# Altium PCB AcousticsSingleChannel.PcbDoc
Units mil, origin at the board's own origin, x right, y up, seen from the top; angles counter-clockwise.
Board outline 1010 x 3000 mil, 4 copper layers (Top Layer, Int1 (GND), Int2 (AGND), Bottom Layer), stack 53.912 mil thick; 56 components, 34 nets, 159 pads, 36 vias.
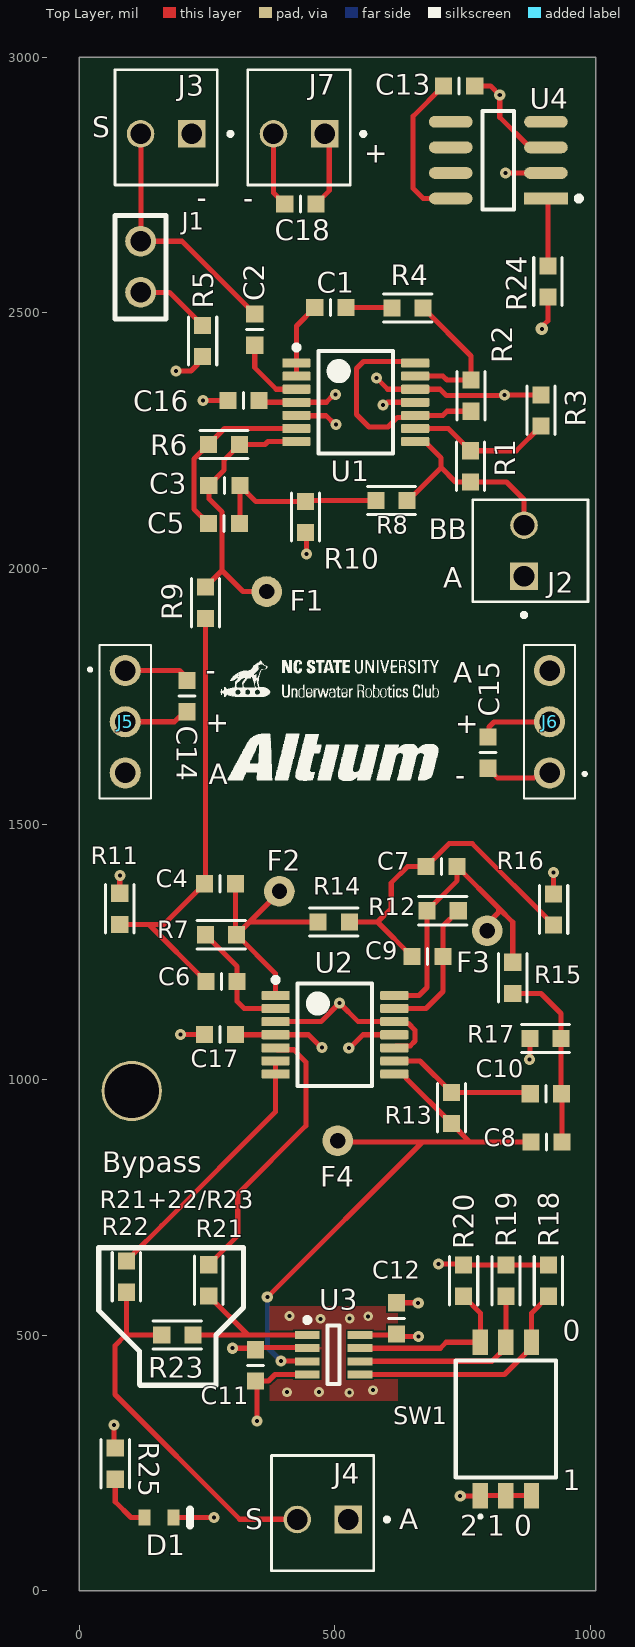
[diagram p0: Top Layer view]
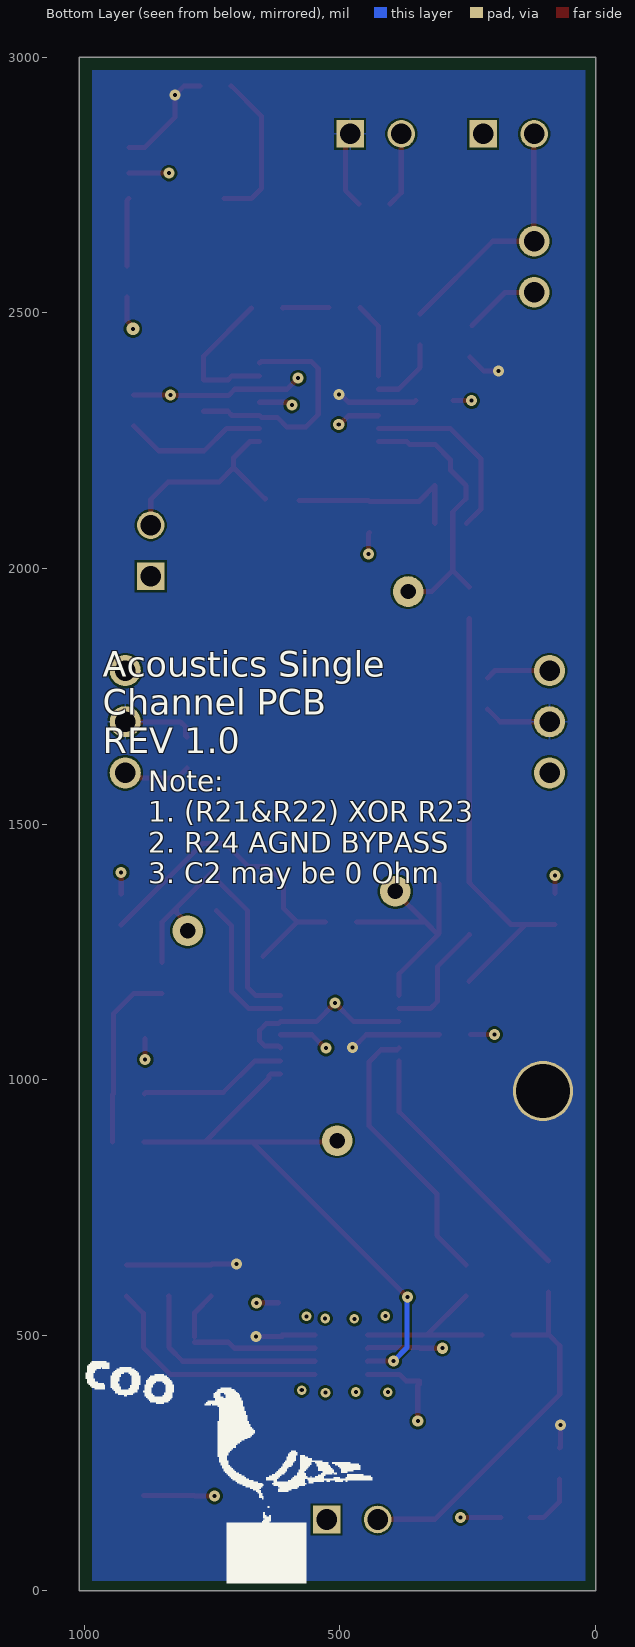
[diagram p1: Bottom Layer view, seen from below]
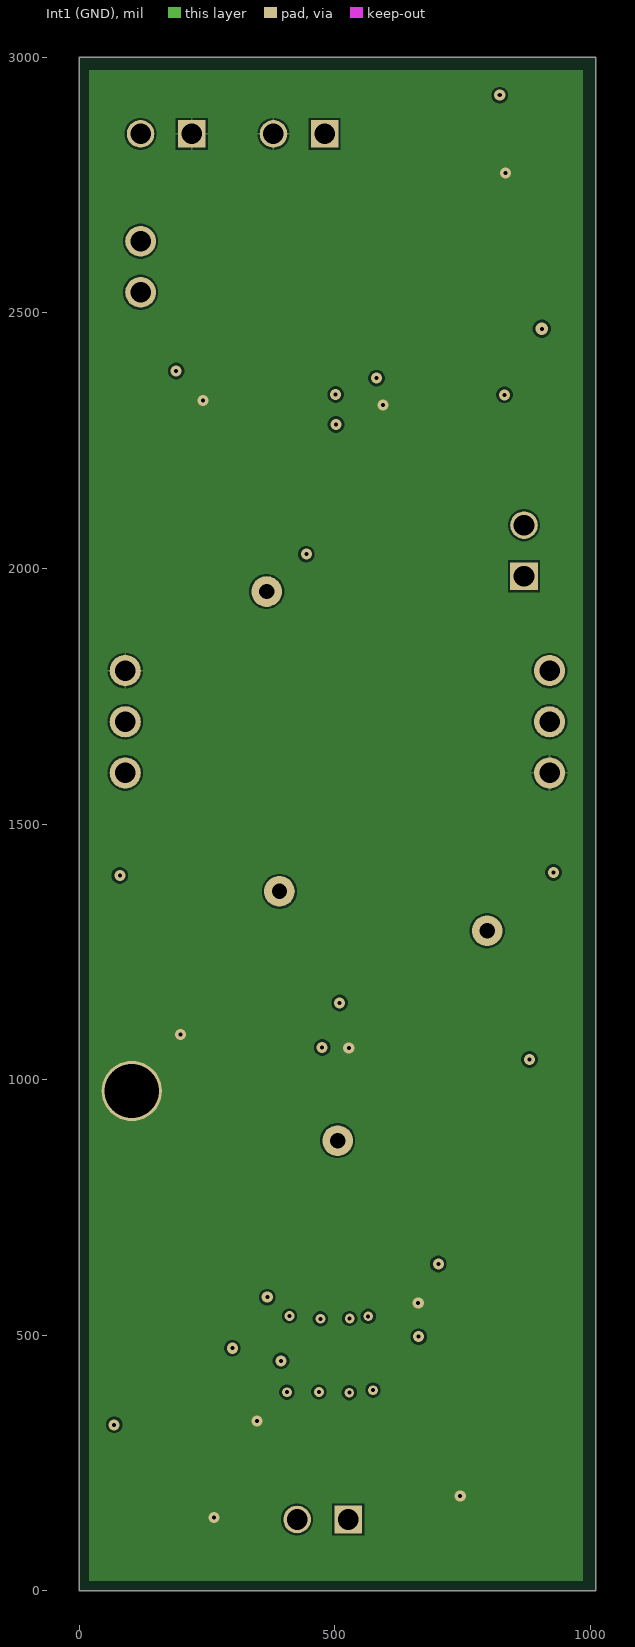
[diagram p2: Int1 (GND)]
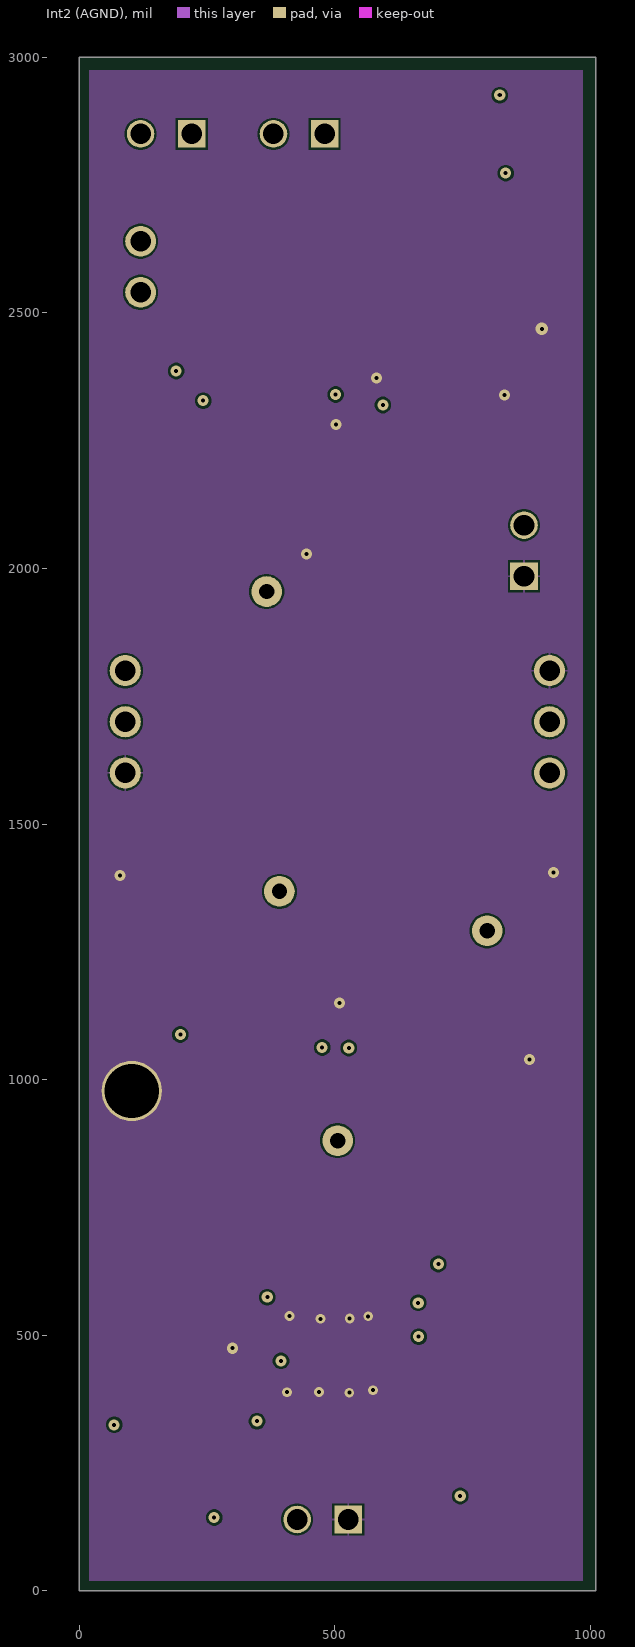
[diagram p3: Int2 (AGND)]
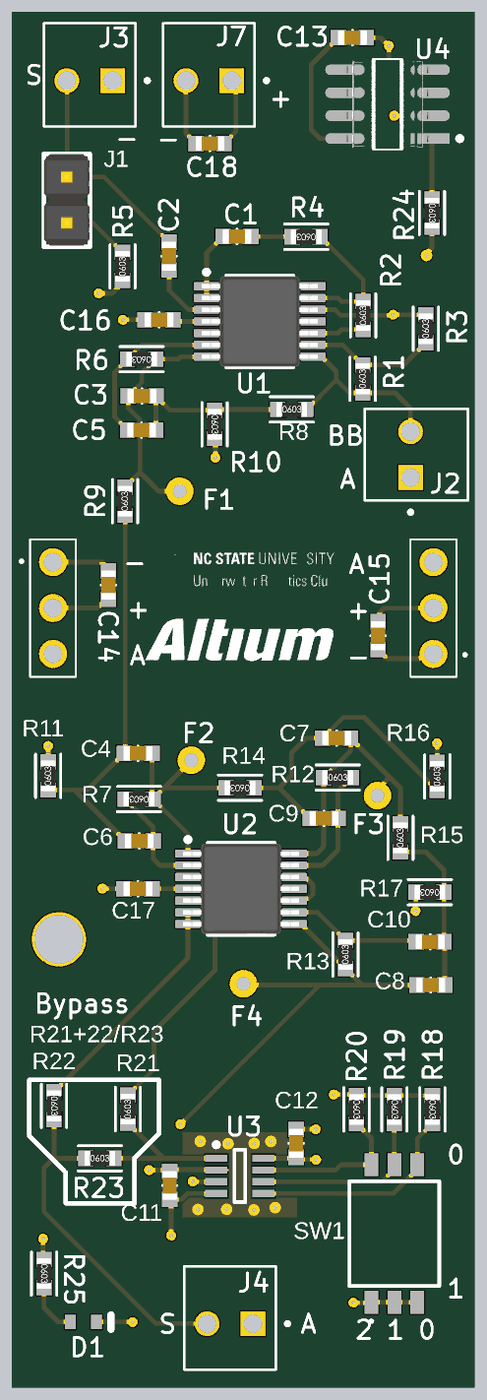
[diagram p4: 3D render of the assembled board from above, using the file's embedded part models]

## Layer stack, top to bottom
Top Solder: solder mask 1, SM-001, Dk 4
Top Layer: signal copper 1.378
Dielectric 1: prepreg 5.1, PP-017, Dk 4.3
Dielectric 2: prepreg 5.1, PP-017, Dk 4.3
Int1 (GND): signal copper 1.378
Dielectric 3: core 28, Core-039, Dk 4.8
Int2 (AGND): signal copper 1.378
Dielectric 4: prepreg 5.1, PP-017, Dk 4.3
Dielectric 5: prepreg 5.1, PP-017, Dk 4.3
Bottom Layer: signal copper 1.378
Bottom Solder: solder mask 1, SM-001, Dk 4

## Board outline
0,0 1010,0 1010,3000 0,3000

## Design rules (kind name [scope] priority, off if disabled: settings)
BoardOutlineClearance [All] p1: gap=7.87 ignorepadtopadclearanceinfootprint=FALSE
Clearance [All] p1: gap=4 ignorepadtopadclearanceinfootprint=FALSE except(5: Arc-Via Track-Via SMDPad-Via THPad-Via Via-Via Via-Fill Via-Poly Via-Region Via-Text; 9.84: Arc-Hole Track-Hole SMDPad-Hole THPad-Hole Via-Hole Fill-Hole Poly-Hole Region-Hole Text-Hole)
ComponentClearance [All] p1: gap=4 collisioncheckmode=3 verticalgap=4 showdistances=TRUE
DiffPairsRouting [All] p1: maxlimit=4 minlimit=4 mostfreqgap=4 toplayer_minwidth=4 toplayer_maxwidth=71497.94 toplayer_prefwidth=4 midlayer1_minwidth=4 midlayer1_maxwidth=71497.94 midlayer1_prefwidth=4 midlayer2_minwidth=4 midlayer2_maxwidth=71497.94 midlayer2_prefwidth=4 bottomlayer_minwidth=4 bottomlayer_maxwidth=71497.94 bottomlayer_prefwidth=4 maxuncoupledlength=500
Height [All] p1: minheight=0 maxheight=71497.94 prefheight=500
HoleSize [All] p1: absolutevalues=TRUE maxlimit=248.03 minlimit=7.87 maxpercent=80.000 minpercent=20.000
HoleToHoleClearance [All] p1: gap=9.84 allowstackedmicrovias=FALSE
MinimumAnnularRing [All] p1: minimumring=3
MinimumSolderMaskSliver [All] p1: minsoldermaskwidth=0
PlaneClearance [All] p1: clearance=4
PlaneConnect PlaneConnectPowerPads [InPadClass('PowerPads')] p1: planeconnectstyle=Direct reliefexpansion=20 reliefentries=4 reliefconductorwidth=10 reliefairgap=10
PlaneConnect [All] p2: pad.planeconnectstyle=Relief pad.reliefexpansion=11.81 pad.reliefentries=4 pad.reliefconductorwidth=4 pad.reliefairgap=4 via.planeconnectstyle=Direct via.reliefexpansion=11.81 via.reliefentries=4 via.reliefconductorwidth=5 via.reliefairgap=5
PolygonConnect PolygonConnectPowerPads [All vs (InPadClass('PowerPads'))] p1: connectstyle=Direct reliefconductorwidth=10 reliefentries=4 polygonreliefangle="90 Angle" airgapwidth=10
PolygonConnect [All] p2: thpad.connectstyle=Relief thpad.reliefconductorwidth=4 thpad.reliefentries=4 thpad.polygonreliefangle="90 Angle" thpad.airgapwidth=4 smdpad.connectstyle=Relief smdpad.reliefconductorwidth=4 smdpad.reliefentries=4 smdpad.polygonreliefangle="90 Angle" smdpad.airgapwidth=4 via.connectstyle=Direct via.reliefconductorwidth=5 via.reliefentries=4 via.polygonreliefangle="90 Angle" via.airgapwidth=5
RoutingVias [All] p1: holewidth=7.87 width=17.72 viastyle="Through Hole" minholewidth=7.87 minwidth=17.72 maxholewidth=248.03 maxwidth=257.87
SilkToSilkClearance [All] p1: silktosilkclearance=0
SilkToSolderMaskClearance [IsPad] p1: minsilkscreentomaskgap=4 clearancetoexposedcopper=TRUE
SolderMaskExpansion [All] p1: expansion=2.95 istentingtop=FALSE
Width [All] p1: maxlimit=71497.94 minlimit=4 preferedwidth=4
20 further rules are at their usual default settings.

## Classes and differential pairs
component class U_OutputAmplifier: C11 C12 R18 R19 R20 U3
component class U_BufferBiasAmp: C1 C2 C16 J1 R1 R2 R3 R4 R5 U1
component class Channel: C13 C14 C15 C18 D1 J2 J3 J4 J5 J6 J7 R21 R22 R23 R24 R25 U4
component class "U_Band Pass Filter": C3 C4 C5 C6 C7 C8 C9 C10 C17 R6 R7 R8 R9 R10 R11 R12 R13 R14 R15 R16 R17 U2

## Components (designator, comment, footprint, x,y, rotation, side; value= is the part's Value field where it differs from the comment)
C1 "5100pF" SMD-0603C 491.35,2510.22 r270 top
C2 "5100pF" SMD-0603C 343.3,2467.14 r0 top
C3 "1000pF" SMD-0603C 283.91,2162.2 r270 top
C4 "1000pF" SMD-0603C 275.37,1383.13 r90 top
C5 "1000pF" SMD-0603C 283.18,2087.94 r270 top
C6 "1000pF" SMD-0603C 278.24,1192.19 r90 top
C7 "1000pF" SMD-0603C 708.78,1416.54 r90 top
C8 "1000pF" SMD-0603C 914.16,878 r270 top
C9 "1000pF" SMD-0603C 681.23,1241.08 r90 top
C10 "1000pF" SMD-0603C 912.8,972.4 r270 top
C11 "1µF" SMD-0603C 344.54,440.92 r0 top
C12 "0.10µF" SMD-0603C 620.38,532.88 r0 top
C13 "0.10µF" SMD-0603C 743.26,2943.98 r90 top
C14 "1µF" SMD-0603C 210.98,1750.1 r0 top
C15 "1µF" SMD-0603C 799.35,1639.61 r180 top
C16 "1µF" SMD-0603C 321.26,2328.58 r90 top
C17 "1µF" SMD-0603C 275.3,1087.9 r90 top
C18 "1µF" SMD-0603C 432.51,2712.91 r90 top
D1 "TLMS1100-GS08" VISH-TLMX1100_V 156.29,143.18 r0 top value=1.9V
J1 "Header" "1x2 Header" 120,2590 r270 top
J2 "640456-2" TE_640456-2 870.11,1984.56 r270 top
J3 "640456-2" TE_640456-2 220,2850 r0 top
J4 "640456-2" TE_640456-2 526.18,139.45 r0 top
J5 "TSW-103-07-L-S" TSW-103-XX-YY-S 90,1800 r270 top
J6 "TSW-103-07-L-S" TSW-103-XX-YY-S 920,1600 r90 top
J7 "640456-2" TE_640456-2 480,2850 r0 top
R1 "10k" SMD-0603-RES 765.54,2199.64 r0 top
R2 "10k" SMD-0603-RES 766.61,2337.97 r0 top
R3 "1k" SMD-0603-RES 903.39,2309.05 r0 top
R4 "10k" SMD-0603-RES 642.34,2509.52 r90 top
R5 "4.7k" SMD-0603-RES 241.54,2444.87 r0 top
R6 "54.9k" SMD-0603-RES 283.18,2242.45 r90 top
R7 "41.2k" SMD-0603-RES 277.52,1283.35 r90 top
R8 "17.4k" SMD-0603-RES 610.91,2132.9 r270 top
R9 "13k" SMD-0603-RES 247.03,1932.88 r0 top
R10 "698" SMD-0603-RES 442.42,2100.59 r180 top
R11 "536" SMD-0603-RES 79.36,1334.05 r0 top
R12 "165k" SMD-0603-RES 710.95,1330.26 r270 top
R13 "86.6k" SMD-0603-RES 728.06,944.56 r0 top
R14 "11k" SMD-0603-RES 497.96,1308.18 r90 top
R15 "5.76k" SMD-0603-RES 847.99,1199.02 r0 top
R16 "332" SMD-0603-RES 928.14,1332.85 r0 top
R17 "174" SMD-0603-RES 912.12,1080.4 r90 top
R18 "10k" SMD-0603-RES 917.7,606.72 r180 top
R19 "10k" SMD-0603-RES 834.86,606.72 r180 top
R20 "10k" SMD-0603-RES 752.02,606.72 r180 top
R21 "0.0" SMD-0603-RES 253.3,607.35 r0 top
R22 "0.0" SMD-0603-RES 92.14,614.54 r180 top
R23 "0.0" SMD-0603-RES 191.89,500.14 r270 top
R24 "0.0" SMD-0603-RES 916.76,2561.28 r180 top
R25 "300" SMD-0603-RES 70.45,248.72 r180 top
SW1 "416131160803" 416131160803 834.63,336.13 r0 top
U1 "OPA1604AIPWR" PW0014A_N 541.06,2324.94 r0 top
U2 "OPA1604AIPWR" PW0014A_N 500.29,1087.76 r0 top
U3 "LTC6910-3CTS8#TRPBF" LT-TS8-8-TSOT-23_V 497.7,461.72 r0 top value=N/A
U4 "TLE2426CDR" FP-D0008A-IPC_B 819.94,2798.59 r180 top value=N/A

## Footprints (in the part's own frame and the unit in brackets; to place one, negate y for a bottom-side part, rotate by r counter-clockwise, add the part's x,y. Pads: shape width x height; smd on the part's side, far side on the other; paste and mask are expansions set on the pad)
"1x2 Header" [mil]
  round 60 hole 40: 1(-50,0) 2(50,0)
  silkscreen extent -100,-50 102,50, body extent -100,-50 100,50, height 374
416131160803 [mm]
  rect 0.76x1.27 smd: 1(-1.27,-3.81) 2(0,-3.81) 3(1.27,-3.81) 4(1.27,3.81) 5(0,3.81) 6(-1.27,3.81)
  silkscreen extent -2.49,-4.9 2.49,2.9
FP-D0008A-IPC_B [mil]
  rect 85.4x22.92 smd paste+0 mask+0: 1(-93.06,75)
  rrect100% 85.4x22.92 smd paste+0 mask+0: 2(-93.06,25) 3(-93.06,-25) 4(-93.06,-75) 5(93.06,-75) 6(93.06,-25) 7(93.06,25) 8(93.06,75)
  silkscreen extent -162,-97 31,97, body extent -146,-106 146,106, height 10
LT-TS8-8-TSOT-23_V [mm] "SOT23, 8-Leads, Body 2.90x1.63mm, Pitch 0.65mm, IPC High Density, Recommended"
  rect 1.22x0.4 smd: 1(-1.31,0.975) 2(-1.31,0.325) 3(-1.31,-0.325) 4(-1.31,-0.975) 5(1.31,-0.975) 6(1.31,-0.325) 7(1.31,0.325) 8(1.31,0.975)
  silkscreen extent -1.43,-1.45 0.3,1.85, body extent -0.87,-1.45 0.88,1.45, height 1
PW0014A_N [mm] "SOP, 14-Leads, Body 5.1x4.5mm, Pitch 0.65mm, IPC Medium Density"
  rrect22% 1.4x0.45 smd: 1(-2.95,1.95) 2(-2.95,1.3) 3(-2.95,0.65) 4(-2.95,0) 5(-2.95,-0.65) 6(-2.95,-1.3) 7(-2.95,-1.95) 8(2.95,-1.95) 9(2.95,-1.3) 10(2.95,-0.65) 11(2.95,0) 12(2.95,0.65) 13(2.95,1.3) 14(2.95,1.95)
  silkscreen extent -3.07,-2.55 1.85,2.85, body extent -3.21,-2.5 3.21,2.5, height 1
SMD-0603-RES [mm]
  rect 0.85x0.85 smd: 1(0,0.775) 2(0,-0.775)
  silkscreen extent -0.7,-1.2 0.7,1.2, body extent -0.4,-0.85 0.4,0.85, height 0.56
SMD-0603C [mm]
  rect 0.85x0.85 smd: 1(0,0.775) 2(0,-0.775)
  silkscreen extent -0.4,0 0.4,0, body extent -0.4,-0.8 0.4,0.8, height 0.9
TE_640456-2 [mm]
  rect 1.37x1.37 hole 1.02: 1(0,0)
  round 1.37 hole 1.02: 2(-2.54,0)
  silkscreen extent -3.81,-2.54 2.02,3.18
TSW-103-XX-YY-S [mm]
  round 1.55 hole 1.02: 1(0,0) 2(2.54,0) 3(5.08,0)
  silkscreen extent -1.27,-1.8 6.35,1.27
VISH-TLMX1100_V [mm] "SMD, 2-Leads, Body 1.6x0.8mm"
  rect 0.6x0.8 smd: 1(-0.725,0) 2(0.725,0)
  silkscreen extent 1.53,-0.4 1.53,0.4, body extent -0.8,-0.4 0.8,0.4, height 0.65

## Part data
C1: library part GRM1887U1H512JA01D, "CAP CER 5100PF 50V U2J 0603", Manufacturer="Murata Electronics North America", Operating Temperature="-55°C ~ 125°C", Package / Case="0603 (1608 Metric)", Datasheet Link=https://www.digikey.com/en/products/detail/murata-electronics/GRM1887U1H512JA01D/2612102, Manufacturer Part Number=GRM1887U1H512JA01D
C2: library part GRM1887U1H512JA01D, "CAP CER 5100PF 50V U2J 0603", Digi-Key Part Number=490-6399-1-ND, Manufacturer="Murata Electronics North America", Operating Temperature="-55°C ~ 125°C", Package / Case="0603 (1608 Metric)", Ratings=-, Temperature Coefficient=U2J, Tolerance=±5%, Voltage=50V, @ qty=0, Applications="General Purpose", Datasheets=http://www.murata.com/~/media/webrenewal/support/library/catalog/products/capacitor/mlcc/c02e.pdf, Factory Stock=0, Features=-, Height - Seated (Max)=-, Image=//media.digikey.com/Renders/Murata%20Renders/ZRB-SERIES-0402.jpg, Lead Spacing=-, Lead Style=-, Minimum Quantity=1, Mounting Type="Surface Mount, MLCC", Packaging="Cut Tape (CT)", Part Number=GRM1887U1H512JA01D, Part Status=Active, Quantity Available=12288, Series=GRM, Size / Dimension="0.063\" L x 0.031\" W (1.60mm x 0.80mm)", Thickness (Max)="0.035\" (0.90mm)", Unit Price (USD)=0.2
C3 C4 C5 C6 C7 C8 C9 C10: library part GCJ188R71H102KA01D, "CAP CER 1000PF 50V X7R 0603", Manufacturer="Walsin Technology Corporation", Manufacturer Part Number=0603N102F500CT, Operating Temperature="-55°C ~ 125°C", Package / Case="0603 (1608 Metric)", Datasheet Link=https://www.digikey.com/en/products/detail/walsin-technology-corporation/0603N102F500CT/9354972
C11: library part GCM188R71C105KA64D, "CAP CER 1UF 16V X7R 0603", Digi-Key Part Number=490-5241-1-ND, Manufacturer="Murata Electronics North America", Operating Temperature="-55°C ~ 125°C", Package / Case="0603 (1608 Metric)", Ratings=AEC-Q200, Temperature Coefficient=X7R, Tolerance=±10%, Voltage=16V, @ qty=0, Applications=Automotive, Datasheets=http://www.murata.com/~/media/webrenewal/support/library/catalog/products/capacitor/mlcc/c03e.ashx, Factory Stock=0, Features=-, Height - Seated (Max)=-, Image=//media.digikey.com/Renders/Murata%20Renders/0603%28GCM188%29.jpg, Lead Spacing=-, Lead Style=-, Minimum Quantity=1, Mounting Type="Surface Mount, MLCC", Packaging="Cut Tape (CT)", Part Number=GCM188R71C105KA64D, Part Status=Active, Quantity Available=9243, Series=GCM, Size / Dimension="0.063\" L x 0.031\" W (1.60mm x 0.80mm)", Thickness (Max)="0.035\" (0.90mm)", Unit Price (USD)=0.24
C12: library part GCJ188R71C104KA01D, "CAP CER 0.1UF 16V X7R 0603", Digi-Key Part Number=490-5796-1-ND, Manufacturer="Murata Electronics North America", Operating Temperature="-55°C ~ 125°C", Package / Case="0603 (1608 Metric)", Ratings=AEC-Q200, Temperature Coefficient=X7R, Tolerance=±10%, Voltage=16V, @ qty=0, Applications="Automotive, Boardflex Sensitive", Datasheets=http://www.murata.com/~/media/webrenewal/support/library/catalog/products/capacitor/mlcc/c03e.ashx, Factory Stock=0, Features="Soft Termination", Height - Seated (Max)=-, Image=//media.digikey.com/Renders/Murata%20Renders/0603%28LQG18%29.jpg, Lead Spacing=-, Lead Style=-, Minimum Quantity=1, Mounting Type="Surface Mount, MLCC", Packaging="Cut Tape (CT)", Part Number=GCJ188R71C104KA01D, Part Status=Active, Quantity Available=22473, Series=GCJ, Size / Dimension="0.063\" L x 0.031\" W (1.60mm x 0.80mm)", Thickness (Max)="0.035\" (0.90mm)", Unit Price (USD)=0.21
C13: library part GCJ188R71C104KA01D, "CAP CER 0.1UF 16V X7R 0603", Manufacturer="Samsung Electro-Mechanics", Manufacturer Part Number=CL10B104KB8NNWC, Operating Temperature="-55°C ~ 125°C", Package / Case="0603 (1608 Metric)", Datasheet Link=https://www.digikey.com/en/products/detail/samsung-electro-mechanics/CL10B104KB8NNWC/3887593
C14 C15 C16 C17 C18: library part GCM188R71C105KA64D, "CAP CER 1UF 16V X7R 0603", Manufacturer="Samsung Electro-Mechanics", Manufacturer Part Number=CL10A105KA8NNNC, Operating Temperature="-55°C ~ 125°C", Package / Case="0603 (1608 Metric)", Datasheet Link=https://www.digikey.com/en/products/detail/samsung-electro-mechanics/CL10A105KA8NNNC/3886760
D1: library part CMP-1666-00027-1, "LED, RED, 2.1 V, -40 to 100 degC, 2-Pin SMD (0603), RoHS, Tape and Reel", Manufacturer="Wurth Elektronics", Manufacturer Part Number=150080SS75000, Operating Temperature=-40to85degC, Package / Case="0805 (2012 Metric)", Datasheet Link=https://www.mouser.com/ProductDetail/Wurth-Elektronik/150080SS75000?qs=LlUlMxKIyB2zzpiaOzrUdw%3D%3D&mgh=1&gclid=Cj0KCQjwm6KUBhC3ARIsACIwxBhChbj4MsdASq_HKZ9IIHp_SBsI6cWeNQVHWnPWPX4ZaUjtoXFUdFUaAm30EALw_wcB, RoHS=Pb-Free
J1: library part "1x2 Header", "CONN HEADER VERT 2POS 2.54MM"
J2 J4 J7: "Connector Header Through Hole 2 position 0.100 _2.54mm_", Package=None, Availability=Unavailable, EU_RoHS_Compliance=Compliant, MF="TE Connectivity", MP=640456-2, Price=None, SnapEDA_Link=https://www.snapeda.com/parts/640456-2/TE%20Connectivity%20AMP%20Connectors/view-part/1957547/?ref=snap, TE_purchase_URL=https://www.te.com/usa-en/product-640456-2.html?te_bu=Cor&te_type=disp&te_campaign=seda_glo_cor-seda-global-disp-prtnr-fy19-seda-model-bom-cta_sma-317_1&elqCampaignId=32493
J3: "Connector Header Through Hole 2 position 0.100 _2.54mm_ Keyed", Package=None, Availability=Unavailable, EU_RoHS_Compliance=Compliant, MF="TE Connectivity", MP=640456-2, Price=None, SnapEDA_Link=https://www.snapeda.com/parts/640456-2/TE%20Connectivity%20AMP%20Connectors/view-part/1957547/?ref=snap, TE_purchase_URL=https://www.te.com/usa-en/product-640456-2.html?te_bu=Cor&te_type=disp&te_campaign=seda_glo_cor-seda-global-disp-prtnr-fy19-seda-model-bom-cta_sma-317_1&elqCampaignId=32493
J5 J6: "1x3 2.54\" pitch", Manufacturer_Name=SAMTEC, Datasheet Link=http://suddendocs.samtec.com/prints/tsw-xxx-xx-xxx-x-xx-xxx-mkt.pdf, Manufacturer_Part_Number=TSW-103-07-L-S
R1 R2 R4 R18 R19 R20: library part ERJ-3EKF1002V, "RES SMD 10K OHM 1% 1/10W 0603", Manufacturer="Panasonic Electronic Components", Manufacturer Part Number=RNCP0603FTD10K0, Operating Temperature="-55°C ~ 155°C", Package / Case="0603 (1608 Metric)", Datasheet Link=https://www.digikey.com/en/products/detail/stackpole-electronics-inc/RNCP0603FTD10K0/2240139
R3: library part ERJ-3EKF1001V, "RES SMD 1K OHM 1% 1/10W 0603", Manufacturer="Stackpole Electronics Inc", Manufacturer Part Number=RNCP0603FTD1K00, Operating Temperature="-55°C ~ 155°C", Package / Case="0603 (1608 Metric)", Datasheet Link=https://www.digikey.com/en/products/detail/stackpole-electronics-inc/RNCP0603FTD1K00/2240106
R5: library part ERJ-3EKF4701V, "RES SMD 4.7K OHM 1% 1/10W 0603", Manufacturer="Panasonic Electronic Components", Operating Temperature="-55°C ~ 155°C", Package / Case="0603 (1608 Metric)", Datasheet Link=https://www.digikey.com/en/products/detail/panasonic-electronic-components/ERJ-3EKF4701V/1746419, Manufacturer Part Number=ERJ-3EKF4701V
R6: library part ERJ-3EKF5492V, "RES SMD 54.9K OHM 1% 1/10W 0603", Manufacturer="Panasonic Electronic Components", Operating Temperature="-55°C ~ 155°C", Package / Case="0603 (1608 Metric)", Datasheet Link=https://www.digikey.com/en/products/detail/panasonic-electronic-components/ERJ-3EKF5492V/196403, Manufacturer Part Number=ERJ-3EKF5492V
R7: library part ERJ-3EKF4122V, "RES SMD 41.2K OHM 1% 1/10W 0603", Manufacturer="Panasonic Electronic Components", Operating Temperature="-55°C ~ 155°C", Package / Case="0603 (1608 Metric)", Datasheet Link=https://www.digikey.com/en/products/detail/yageo/RC0603FR-0741K2L/727225, Manufacturer Part Number=ERJ-3EKF4122V
R8: library part ERJ-3EKF1742V, "RES SMD 17.4K OHM 1% 1/10W 0603", Manufacturer="Panasonic Electronic Components", Operating Temperature="-55°C ~ 155°C", Package / Case="0603 (1608 Metric)", Datasheet Link=https://www.digikey.com/en/products/detail/panasonic-electronic-components/ERJ-3EKF1742V/196159, Manufacturer Part Number=ERJ-3EKF1742V
R9: library part ERJ-3EKF1302V, "RES SMD 13K OHM 1% 1/10W 0603", Manufacturer="Panasonic Electronic Components", Operating Temperature="-55°C ~ 155°C", Package / Case="0603 (1608 Metric)", Datasheet Link=https://www.digikey.com/en/products/detail/panasonic-electronic-components/ERJ-3EKF1302V/196110, Manufacturer Part Number=ERJ-3EKF1302V
R10: library part ERJ-3EKF6980V, "RES SMD 698 OHM 1% 1/10W 0603", Manufacturer="Panasonic Electronic Components", Operating Temperature="-55°C ~ 155°C", Package / Case="0603 (1608 Metric)", Datasheet Link=https://www.digikey.com/en/products/detail/panasonic-electronic-components/ERJ-3EKF6980V/196453, Manufacturer Part Number=ERJ-3EKF6980V
R11: library part ERJ-3EKF5360V, "RES SMD 536 OHM 1% 1/10W 0603", Manufacturer="Panasonic Electronic Components", Operating Temperature="-55°C ~ 155°C", Package / Case="0603 (1608 Metric)", Datasheet Link=https://www.digikey.com/en/products/detail/panasonic-electronic-components/ERJ-3EKF5360V/196400, Manufacturer Part Number=ERJ-3EKF5360V
R12: library part ERJ-3EKF1653V, "RES SMD 165K OHM 1% 1/10W 0603", Manufacturer="Panasonic Electronic Components", Operating Temperature="-55°C ~ 155°C", Package / Case="0603 (1608 Metric)", Datasheet Link=https://www.digikey.com/en/products/detail/panasonic-electronic-components/ERJ-3EKF1653V/196155, Manufacturer Part Number=ERJ-3EKF1653V
R13: library part ERJ-3EKF8662V, "RES SMD 86.6K OHM 1% 1/10W 0603", Manufacturer="Panasonic Electronic Components", Operating Temperature="-55°C ~ 155°C", Package / Case="0603 (1608 Metric)", Datasheet Link=https://www.digikey.com/en/products/detail/panasonic-electronic-components/ERJ-3EKF8662V/196500, Manufacturer Part Number=ERJ-3EKF8662V
R14: library part ERJ-3EKF1102V, "RES SMD 11K OHM 1% 1/10W 0603", Manufacturer="Panasonic Electronic Components", Operating Temperature="-55°C ~ 155°C", Package / Case="0603 (1608 Metric)", Datasheet Link=https://www.digikey.com/en/products/detail/panasonic-electronic-components/ERJ-3EKF1102V/196083, Manufacturer Part Number=ERJ-3EKF1102V
R15: library part ERJ-3EKF5761V, "RES SMD 5.76K OHM 1% 1/10W 0603", Manufacturer="Panasonic Electronic Components", Operating Temperature="-55°C ~ 155°C", Package / Case="0603 (1608 Metric)", Datasheet Link=https://www.digikey.com/en/products/detail/panasonic-electronic-components/ERJ-3EKF5761V/196388, Manufacturer Part Number=ERJ-3EKF5761V
R16: library part ERJ-3EKF3320V, "RES SMD 332 OHM 1% 1/10W 0603", Manufacturer="Panasonic Electronic Components", Operating Temperature="-55°C ~ 155°C", Package / Case="0603 (1608 Metric)", Datasheet Link=https://www.digikey.com/en/products/detail/panasonic-electronic-components/ERJ-3EKF3320V/196300, Manufacturer Part Number=ERJ-3EKF3320V
R17: library part ERJ-3EKF1740V, "RES SMD 174 OHM 1% 1/10W 0603", Manufacturer="Panasonic Electronic Components", Operating Temperature="-55°C ~ 155°C", Package / Case="0603 (1608 Metric)", Datasheet Link=https://www.digikey.com/en/products/detail/panasonic-electronic-components/ERJ-3EKF1740V/196162, Manufacturer Part Number=ERJ-3EKF1740V
R21 R22 R23 R24: library part ERJ-3GEY0R00V, "RES SMD 0.0OHM JUMPER 1/10W 0603", Manufacturer="Stackpole Electronics Inc", Manufacturer Part Number=RMCF0603ZT0R00, Operating Temperature="-55°C ~ 155°C", Package / Case="0603 (1608 Metric)", Datasheet Link=https://www.digikey.com/en/products/detail/stackpole-electronics-inc/RMCF0603ZT0R00/1756908
R25: library part ERJ-3EKF3000V, "RES SMD 300 OHM 1% 1/10W 0603", Manufacturer="Panasonic Electronic Components", Operating Temperature="-55°C ~ 155°C", Package / Case="0603 (1608 Metric)", Datasheet Link=https://www.digikey.com/en/products/detail/panasonic-electronic-components/ERJ-3EKF3000V/1746363, Manufacturer Part Number=ERJ-3EKF3000V
SW1: "Switch", Manufacturer_Name="Wurth Elektronik", Mouser Part Number=710-416131160803, Datasheet Link=https://www.we-online.com/catalog/datasheet/416131160803.pdf, Height=2.65mm, Manufacturer_Part_Number=416131160803, Mouser Price/Stock=https://www.mouser.co.uk/ProductDetail/Wurth-Elektronik/416131160803?qs=2kOmHSv6VfS5Uv9iBh18ZA%3D%3D
U1 U2: library part CMP-0272-01731-3, "Sound Plus High-Performance, Bipolar-Input Audio Operational Amplifier, 4.5 to 36 V, -40 to 85 degC, 14-pin SOP (PW14), Green (RoHS & no Sb/Br)", Manufacturer="Texas Instruments", Operating Temperature="-40°C ~ 85°C", Package / Case=14-TSSOP, Datasheet Link=https://www.digikey.com/en/products/detail/texas-instruments/OPA1604AIPWR/2793768, Manufacturer Part Number=OPA1604AIPWR
U3: library part CMP-0359-03721-2, Manufacturer="Analog Devices Inc.", Manufacturer Part Number=LTC6910-3CTS8#TRMPBF, Operating Temperature="0°C ~ 70°C", Package / Case=TSOT-23-8, Datasheet Link=https://www.analog.com/media/en/technical-documentation/data-sheets/6910fb.pdf, RoHS=Pb-Free
U4: library part CMP-04916-000011-1, "Ground Reference (Virtual) Voltage Reference IC Adjustable 2V 20 VV ±1% 20 mA 8-SOIC", Manufacturer="Texas Instruments", Manufacturer Part Number=TLE2426MD, Operating Temperature="-55°C ~ 125°C", Package / Case=8-SOIC, Datasheet Link=https://www.digikey.com/en/products/detail/texas-instruments/TLE2426MD/1676989

## Free pads (board coordinates)
  round 60 hole 30: 2(366.6,1954.73) 3(391.62,1368.18) 4(797.96,1291.1) 5(505.43,880.65)
  round 118.11 hole 106.3: 6(102.79,977.73)

## Via types
v1: diameter 21.65, hole 7.87, Top Layer to Bottom Layer, 27 vias
v2: diameter 19, hole 7.9, Top Layer to Bottom Layer, 8 vias
v3: diameter 25, hole 7.87, Top Layer to Bottom Layer, 1 vias

## Nets (pads, with @x,y where several pads share a name; then routed paths per layer and width w, separated by ;. In a path a pad name is that pad's centre, name@x,y a point inside that pad or via, vN(x,y) a via of type N, cw(c..) or ccw(c..) an arc to the next point about the centre after c; other vN are vias at no path point)
AGND: C11.1 J2.1 J4.1 J5.3 J6.3 R3.1 R10.1 R11.1 R16.1 R17.1 R24.1 U1.5 U1.12 U2.3 U2.10 U2.12 U3.2 | length 1173.8
  Top Layer w10: R11.1 v1(79.36,1399.11) ; v1(299.62,474.48) 343.5,474.48 344.54,475.52 366.79,475.52 ; 366.81,475.55 445.09,475.55 U3.2 ; U2.3 472.89,1113.35 v1(509.41,1149.87) 545.93,1113.35 U2.12 620.29,1109.49 644.11,1109.49 656.98,1096.62 656.98,1075.33 647.68,1066.02 620.29,1066.02 U2.10 ; U1.5 425.53,2298.73 483.11,2298.73 500.44,2281.4 v1(502.3,2281.4) ; R10.1 444.3,2068.19 v1(444.3,2027.8) ; v1(581.67,2372.22) 581.9,2372.22 603.58,2350.53 U1.12 705.66,2350.53 718.22,2337.97 830.32,2337.97 v1(831.82,2339.47) 903.29,2339.47 R3.1 ; v1(880.92,1039.37) 881.61,1040.06 R17.1 ; v3(904.93,2468.7) 904.93,2472.76 916.76,2484.59 R24.1 ; v1(927.88,1405.09) 927.88,1363.62 R16.1
  other v2: 528.32,387.52 406.26,388.57 468.88,388.93 574.7,392.53 471.79,531.94 528.94,532.48 411.19,537.37 565.36,536.76
Amp_Out: R21.2 R23.1 U3.1 | length 332.3
  Top Layer w10: R23.1 330.02,500.11 ; R21.2 330.02,500.11 ; U3.1 330.02,500.11
BBA_Out: J2.2 R1.2 R8.1 U1.8 | length 408.6
  Top Layer w10: R8.1@645.73,2136.31 646.94,2136.31 708,2197.37 ; U1.8 675.9,2248.17 708,2216.07 708,2197.37 ; J2.2 870.11,2134.84 835.82,2169.13 R1.2 736.24,2169.13 708,2197.37
F1_In: C3.1 C5.1 R8.2 R10.2 | length 354.2
  Top Layer w10: C5.1 314.43,2088.67 C3.1 345.53,2131.1 R10.2 444.22,2132.9 R8.2
F1_Out: C3.2 pad.2 R6.2 R9.1 U1.7 | length 546
  Top Layer w10: R9.1 279.4,1995.76 ; pad.2 320.43,1954.73 279.4,1995.76 ; U1.7 369.18,2248.17 363.46,2242.45 R6.2 283.55,2212.3 283.55,2192.35 C3.2 253.74,2161.86 253.74,2136.33 279.4,2110.67 279.4,1995.76
F2_In: C4.1 C6.1 R9.2 R11.2 | length 876.1
  Top Layer w10: R11.2 136.38,1303.53 ; R9.2 247.03,1385.31 C4.1 165.26,1303.53 136.38,1303.53 ; C6.1 136.38,1303.53
F2_Out: C4.2 pad.3 R7.2 R14.1 U2.1 | length 505.1
  Top Layer w10: C4.2 305.88,1285.51 R7.2 ; U2.1 384.14,1207.24 R7.2 ; pad.3 391.62,1366.95 332.86,1308.18 ; R14.1 332.86,1308.18 ; R7.2 332.86,1308.18
F3_In: C7.1 C9.1 R14.2 R16.2 | length 653.2
  Top Layer w10: R14.2 583.61,1308.18 ; C9.1 583.61,1308.18 ; R16.2 768.98,1461.49 723.22,1461.49 C7.1 642.08,1416.54 610.44,1384.9 610.44,1335.01 583.61,1308.18
F3_Out: C7.2 pad.4 R12.2 R15.1 U2.14 | length 617.1
  Top Layer w10: U2.14 664.86,1164.53 680.44,1180.11 R12.2 739.29,1389.11 C7.2 820.1,1335.73 ; pad.4 797.96,1304.63 820.1,1326.78 820.1,1335.73 ; R15.1 847.99,1307.84 820.1,1335.73
F4_In: C8.1 C10.1 R15.2 R17.2 | length 363
  Top Layer w10: R15.2 903.38,1168.51 942.63,1129.26 R17.2 942.63,973.08 C10.1 944.67,971.05 C8.1
F4_Out: C8.2 pad.5 R13.2 U2.8 U3.3 | length 1201.3
  Top Layer w10: v1(367.85,574.31) 671.53,878 ; v1(394.84,449.69) 395.22,449.31 445.74,449.31 U3.3 ; pad.5 508.08,878 671.53,878 ; U2.8 635.13,1010.98 638.99,1007.13 638.99,1003.11 R13.2 764.1,878 ; C8.2 764.1,878 ; 671.53,878 764.1,878
  Bottom Layer w10: v1(367.85,574.31) 368.54,573.62 368.54,475.98 v1(394.84,449.69)
G0: R18.1 SW1.4 U3.5 | length 471
  Top Layer w10: U3.5 831.87,423.33 884.63,476.09 SW1.4 884.63,543.13 R18.1
G1: R19.1 SW1.5 U3.6 | length 396.8
  Top Layer w10: U3.6 807.46,448.93 834.63,476.09 SW1.5 834.63,575.98 R19.1
G2: R20.1 SW1.6 U3.7 | length 333.7
  Top Layer w10: U3.7 706.25,474.52 717.86,486.13 SW1.6 ; R20.1 784.63,543.6 SW1.6@784.63,496.17
GND: C11.2 C12.1 C14.1 C15.1 C16.1 C17.1 C18.1 D1.2 J3.1 J5.1 J6.1 J7.2 pad.6 SW1.1 SW1.2 SW1.3 U1.11 U2.11 U3.4 U4.2 | length 1127.9
  Top Layer w10: 120.98,1800.1 196.49,1800.1 C14.1@210.98,1785.61 ; D1.2 v1(263.95,143.18) ; v1(197.79,1088.05) 244.64,1088.05 C17.1 ; v1(242.45,2328.19) 242.83,2328.58 C16.1@278.84,2328.58 ; v1(347.7,331.72) 347.7,401.05 344.54,404.2 C11.2 344.7,410.57 370.42,410.57 383.19,423.33 U3.4 ; J7.2 380,2734.91 C18.1 ; v1(527.29,1061.83) 529.07,1061.83 554.99,1087.76 U2.11 ; v1@596.67,2319.59 598.25,2319.59 603.6,2324.94 U1.11 ; C12.1 620.43,563.35 v1(663.15,563.35) ; v1(745.34,185.48) 783.98,185.48 SW1.1 SW1.2 SW1.3 ; C15.1 818.84,1589.61 889.35,1589.61 J6.1@899.35,1599.61 ; v1(834.21,2773.28) 834.36,2773.43 912.84,2773.43 U4.2
  other v1: 594.05,2319.59
H2C_In: C2.1 J1.1 J3.2 | length 502.9
  Top Layer w10: J3.2@121.57,2860 120.79,2859.21 120.79,2640.79 J1.1 200.95,2640 C2.1
NetC1_1: C1.1 R4.1 | length 90.2
  Top Layer w10: C1.1 611.13,2510.22 R4.1
NetC1_2: C1.2 U1.1 U1.2 | length 149
  Top Layer w10: U1.2 U1.1 424.91,2474.29 C1.2
NetC2_2: C2.2 U1.3 | length 143
  Top Layer w10: C2.2 343.3,2392.72 385.49,2350.53 U1.3
NetC5_2: C5.2 R6.1 U1.6 | length 363.3
  Top Layer w10: C5.2 224.27,2116.34 224.27,2214.04 R6.1 283.98,2273.76 U1.6
NetC6_2: C6.2 R7.1 U2.2 | length 237.1
  Top Layer w10: R7.1 308.75,1221.61 C6.2 308.75,1153.06 322.88,1138.94 U2.2
NetC9_2: C9.2 R12.1 U2.13 | length 279.4
  Top Layer w10: U2.13 678.42,1138.94 711.74,1172.26 C9.2 711.74,1300.53 R12.1
NetC10_2: C10.2 R13.1 U2.9 | length 292.4
  Top Layer w10: U2.9 666.55,1036.57 R13.1 879.62,975.07 C10.2
NetC13_1: C13.1 U4.8 | length 307.2
  Top Layer w10: C13.1 653.23,2884.46 653.23,2743.18 672.82,2723.59 U4.8
NetD1_1: D1.1 R25.1 | length 114.2
  Top Layer w10: R25.1 70.45,174.14 101.41,143.18 D1.1
NetJ1_2: J1.2 R5.1 | length 148.5
  Top Layer w10: J1.2 176.91,2540 R5.1 R5.1@241.4,2475.24
NetR1_1: R1.1 R3.2 U1.9 | length 284.3
  Top Layer w10: U1.9 721.93,2273.76 R1.1 855,2230.15 R3.2
NetR2_1: R2.1 R4.2 U1.13 | length 292.5
  Top Layer w10: U1.13 711.56,2376.12 719.21,2368.48 R2.1 766.61,2415.76 R4.2
NetR2_2: R2.2 U1.10 U1.14 | length 458.6
  Top Layer w10: U1.14 654.11,2404.8 555.89,2404.8 542.41,2391.32 542.41,2301.32 566.87,2276.86 603.87,2276.86 622.5,2295.49 653.34,2295.49 U1.10 711.33,2299.35 719.44,2307.45 R2.2
NetR21_1: R21.1 U2.5 | length 546.1
  Top Layer w10: R21.1 310.08,694.64 310.08,776.37 443.36,909.64 443.36,1034.53 419.58,1058.31 388,1058.31 U2.5
NetR22_2: R22.2 U2.6 U2.7 | length 512.5
  Top Layer w10: R22.2 103.88,656.78 161.21,714.12 384.14,937.05 U2.7 U2.6
NetR24_2: R24.2 U4.1 | length 133.4
  Top Layer w10: U4.1 916.76,2719.82 R24.2
Sig_Out: J4.2 R22.1 R23.2 | length 737.5
  Top Layer w10: R22.1 92.14,501.64 91.12,500.61 ; R23.2 91.12,500.14 91.12,500.61 ; J4.2@426.57,140 314.07,140 70,384.07 70,479.49 91.12,500.61
VCC: C12.2 C13.2 C14.2 C15.2 C16.2 C17.2 C18.2 J5.2 J6.2 J7.1 R5.2 R18.2 R19.2 R20.2 R25.2 U1.4 U2.4 U3.8 U4.3 | length 1369.7
  Top Layer w10: v1(68.34,324.71) 68.34,281.34 R25.2 ; 120.98,1700.1 186.49,1700.1 C14.2@210.98,1724.59 ; v1(189.58,2386.2) 218.52,2386.2 R5.2@245.39,2413.07 ; C17.2 305.96,1087.76 U2.4 448.67,1087.76 v1@474.48,1061.95 ; C16.2 355.4,2324.94 U1.4 483.33,2324.94 498.43,2340.04 v1(501.58,2340.04) ; C18.2 489.05,2738.93 489.05,2840.95 J7.1 ; U3.8 C12.2@612.75,500.11 ; C12.2@612.45,497.13 v1(664.02,497.13) ; v1(702.47,639.12) 750.13,639.12 R20.2 R19.2 R18.2 ; C13.2 804.46,2943.98 v1(822.67,2925.77) 822.67,2882.67 881.75,2823.59 U4.3 ; C15.2 801.66,1672.43 801.66,1689.63 811.64,1699.61 J6.2@899.35,1699.61
  other v1: 475.29,1062.76
pads on no net: U4.4 U4.5 U4.6 U4.7

## Polygon pours and split planes (outlines as drawn)
GND on Int1 (GND) "GND_L02_P010" (solid, pour order 10): 20,2975 985,2975 985,20 20,20
AGND on Top Layer "AGND_L01_P011" (solid, pour order 11): 372.7,556.72 372.7,371.72 622.7,371.72 622.7,556.72
VCC on Bottom Layer "VCC_L04_P008" (solid, pour order 8): 20,2975 985,2975 985,20 20,20
AGND on Int2 (AGND) "AGND_L04_P009" (solid, pour order 9): 985,2975 985,20 20,20 20,2975

## Silkscreen, mask and mechanical layers (free items; w line width, h text height)
Top Overlay:
  drawing of 62 lines, arcs and shapes, not listed
  text "S" at 25.26,2843.11 h40
  text "+" at 558.01,2793.48 h40
  text "-" at 230.17,2705.9 h40
  text "-" at 320.99,2704.83 h40
  text "BB" at 684.11,2056.71 h40
  text "A" at 711.93,1962.41 h40
  text "F1" at 411.78,1917.05 h40
  text "-" at 247.51,1781.01 h40
  text "A" at 731.58,1776.72 h40
  text "+" at 247.51,1679.17 h40
  text "+" at 735.4,1677.1 h40
  text "A" at 253.44,1577.72 h40
  text "-" at 735.4,1575.77 h40
  text "F2" at 366.99,1408.12 h40
  text "F3" at 737.96,1209.6 h40
  text "Bypass" at 44.92,818.76 h40
  text "F4" at 471.82,790.65 h40
  text "R21+22/R23" at 40.13,736.6 h59
  text "0" at 946,488.94 h40
  text "1" at 946,197.08 h40
  text "S" at 325.02,119.92 h40
  text "A" at 626.38,120.49 h40
  text "2 1 0" at 745.81,107.16 h40
Bottom Overlay:
  drawing of 10 lines, arcs and shapes, not listed
  text "Acoustics Single  / Channel PCB / REV 1.0" at 963.93,1638.53 h50
  text "Note:  / 1. (R21&R22) XOR R23 / 2. R24 AGND BYPASS / 3. C2 may be 0 Ohm" at 875.09,1384.12 h40
Mechanical 1:
  lines w10: 0.59,1.11 1009.42,1.11 1009.42,3000.75 0.59,3000.75 0.59,1.11

## Dimensions
1010,0 to 1010,3000 on Mechanical 1
0,0 to 1010,0 on Mechanical 1